# Altium PCB PCB5.pcbdoc
Units mil, origin at the board's own origin, x right, y up, seen from the top; angles counter-clockwise.
Board outline 1968.5 x 791.34 mil, 2 copper layers (Top Layer, Bottom Layer); 30 components, 42 nets, 141 pads, 47 vias.
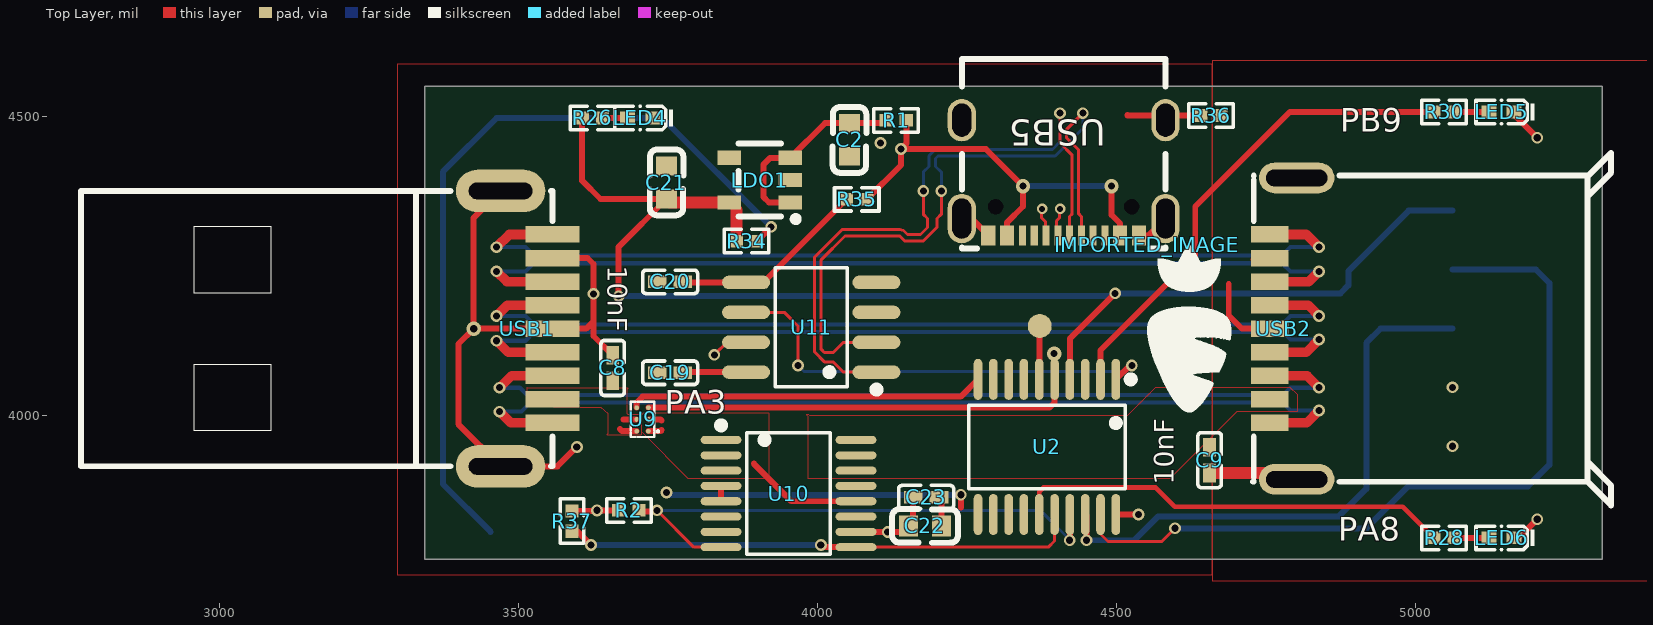
[diagram p0: Top Layer view]
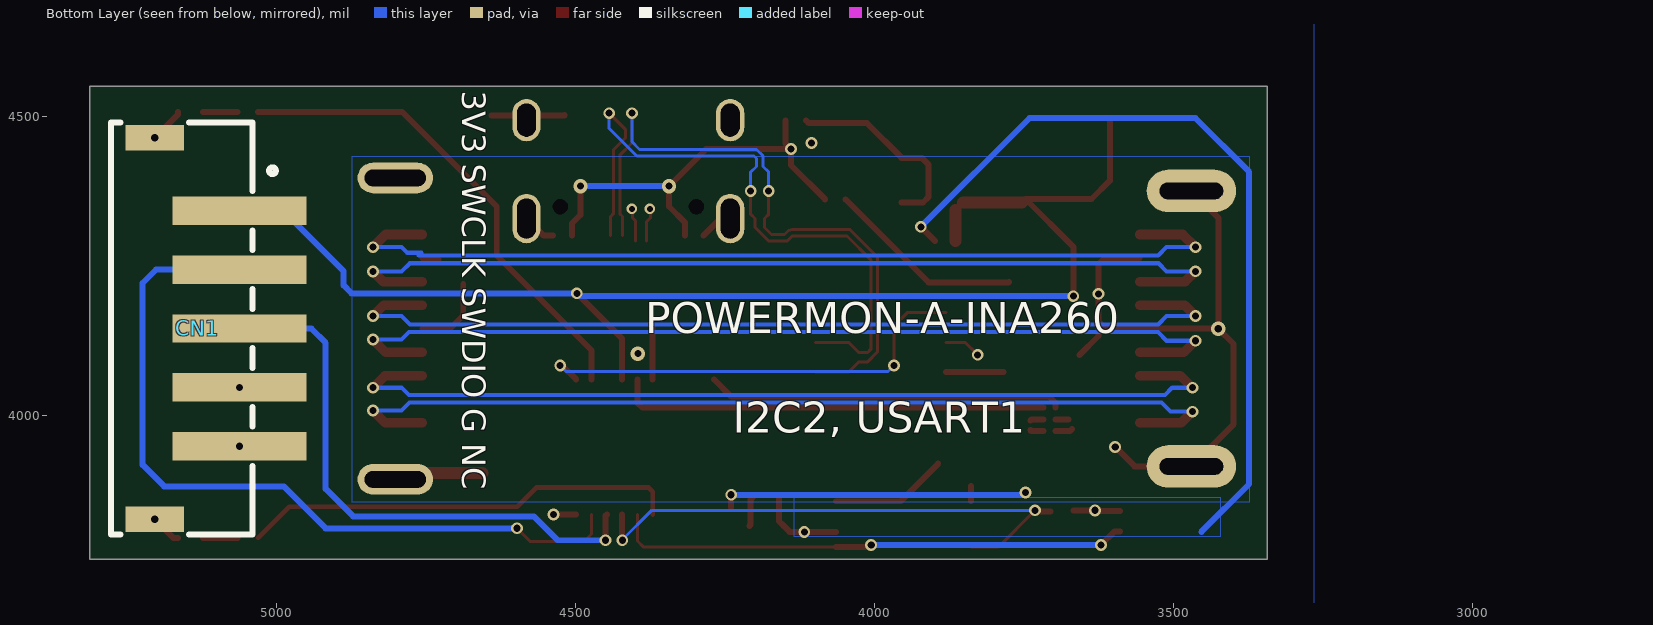
[diagram p1: Bottom Layer view, seen from below]

## Layer stack, top to bottom
Top Solder: solder mask 0.4, Solder Resist, Dk 3.5
Top Layer: signal copper 1.4
Dielectric 1: dielectric 12.6, FR-4, Dk 4.8
Bottom Layer: signal copper 1.4
Bottom Solder: solder mask 0.4, Solder Resist, Dk 3.5

## Board outline
3343.5,3759.42 5312,3759.42 5312,4550.76 3343.5,4550.76

## Components (designator, comment, footprint, x,y, rotation, side; value= is the part's Value field where it differs from the comment)
C2 "" C0603_1 4053.5,4461.15 r90 top
C8 "10nF" C0402 3657.5,4079.55 r270 top
C9 "10nF" C0402 4655.5,3925.55 r90 top
C19 "" C0402_1 3753.5,4071.55 r0 top
C20 "" C0402_1 3753.5,4223.55 r0 top
C21 "" C0603_1 3747.5,4389.55 r270 top
C22 "" C0603_1 4179.5,3815.55 r180 top
C23 "" C0402_1 4181.5,3863.55 r180 top
CN1 "" CONN-SMD_2.54-5P-LT 5132.4,4145.55 r270 bottom
IMPORTED_IMAGE "IMPORTED_IMAGE" IMPORTED_IMAGE 4551.5,4285.55 r0 top
LDO1 "" SOT-23-5_L3.0-W1.7-P0.95-LS2.8-BR 3903.5,4393.55 r0 top
LED4 "" LED0402-RD 3703.5,4497.55 r180 top
LED5 "" LED0402-RD 5143.5,4507.55 r180 top
LED6 "" LED0402-RD 5143.5,3795.55 r180 top
R1 "" R0402 4131.5,4493.55 r180 top
R2 "" R0402 3684.5,3841.55 r180 top
R26 "" R0402 3623.5,4497.55 r0 top
R28 "" R0402 5047.5,3795.55 r0 top
R30 "" R0402 5047.52,4507.55 r0 top
R34 "" R0402 3881.5,4291.55 r0 top
R35 "" R0402 4065.5,4361.55 r0 top
R36 "" R0402 4657.5,4501.55 r180 top
R37 "" R0402 3589.5,3823.55 r90 top
U2 "" TSSOP-20_L6.5-W4.4-P0.65-LS6.4-BL 4383.5,3947.55 r180 top
U9 "" DSBGA-6_L1.5-W1.0-P0.50-TL 3707.5,3993.55 r180 top
U10 "" TSSOP-16_L5.0-W4.4-P0.65-LS6.4-BL 3951.5,3869.55 r270 top
U11 "" SOP-8_L5.0-W4.0-P1.27-LS6.0-BL 3989.5,4147.55 r90 top
USB1 "" USB-3.0-SMD_CU3M002_USBA-M_3 3513.5,4145.25 r270 top
USB2 "" USB-A-SMD_U231-091N-4BLRA00-S-1 4778.5,4145.25 r90 top
USB5 "" USB-C-SMD_TYPE-C-31-M-09 4411.5,4397.55 r180 top

## Footprints (in the part's own frame and the unit in brackets; to place one, negate y for a bottom-side part, rotate by r counter-clockwise, add the part's x,y. Pads: shape width x height; smd on the part's side, far side on the other; paste and mask are expansions set on the pad)
C0402 [mil]
  rect 31.1x21.3 smd: 1(-21.5,0) 2(21.5,0)
  silkscreen extent -46,-20 46,20
C0402_1 [mil]
  rect 31.1x21.3 smd: 1(-21.5,0) 2(21.5,0)
  silkscreen extent -46,-20 46,20
C0603_1 [mil]
  rect 31.5x35.4 smd: 1(-27.6,0) 2(27.6,0)
  silkscreen extent -55,-28 55,28
CONN-SMD_2.54-5P-LT [mil]
  rect 47.2x224.4 smd: 1(-196.9,70.9) 2(-98.4,70.9) 3(0,70.9) 4(98.4,70.9) 5(196.9,70.9)
  rect 43.3x98.4 smd: 6(318.9,-70.9) 7(-318.9,-70.9)
  silkscreen extent -344,-144 344,132
DSBGA-6_L1.5-W1.0-P0.50-TL [mil]
  round 7.9 smd: A1(-9.8,19.7) A2(9.8,19.7) B1(-9.8,0) B2(9.8,0) C1(-9.8,-19.7) C2(9.8,-19.7)
  silkscreen extent -27,-30 20,30
IMPORTED_IMAGE [mil]
  silkscreen extent 0,-280 140,0
LED0402-RD [mil]
  rect 25.1x21.3 smd: 1(-21.2,0) 2(21.2,0)
  silkscreen extent -55,-21 43,21
R0402 [mil]
  rect 22.3x21.3 smd: 1(-17,0) 2(17,0)
  silkscreen extent -37,-20 37,20
SOP-8_L5.0-W4.0-P1.27-LS6.0-BL [mil]
  oval 22.6x80.1 smd: 1(-75,-109) 2(-25,-109) 3(25,-109) 4(75,-109) 5(75,109) 6(25,109) 7(-25,109) 8(-75,109)
  silkscreen extent -110,-115 100,60
SOT-23-5_L3.0-W1.7-P0.95-LS2.8-BR [mil]
  rect 39.4x23.6 smd: 1(51.2,-37.4) 2(51.2,0) 3(51.2,37.4) 4(-51.2,37.4) 5(-51.2,-37.4)
  silkscreen extent -35,-70 65,61
TSSOP-16_L5.0-W4.4-P0.65-LS6.4-BL [mil]
  oval 13.5x68.2 smd: 1(-89.6,-112.8) 2(-64,-112.8) 3(-38.4,-112.8) 4(-12.8,-112.8) 5(12.8,-112.8) 6(38.4,-112.8) 7(64,-112.8) 8(89.6,-112.8) 9(89.6,112.8) 10(64,112.8) 11(38.4,112.8) 12(12.8,112.8) 13(-12.8,112.8) 14(-38.4,112.8) 15(-64,112.8) 16(-89.6,112.8)
  silkscreen extent -120,-119 101,70
TSSOP-20_L6.5-W4.4-P0.65-LS6.4-BL [mil]
  oval 14.3x68.6 smd: 1(-115.2,-113) 2(-89.6,-113) 3(-64,-113) 4(-38.4,-113) 5(-12.8,-113) 6(12.8,-113) 7(38.4,-113) 8(64,-113) 9(89.6,-113) 10(115.2,-113) 11(115.2,113) 12(89.6,113) 13(64,113) 14(38.4,113) 15(12.8,113) 16(-12.8,113) 17(-38.4,113) 18(-64,113) 19(-89.6,113) 20(-115.2,113)
  silkscreen extent -146,-119 131,70
USB-3.0-SMD_CU3M002_USBA-M_3 [mil]
  rect 27.6x90.6 smd: 1(118.1,43.3) 2(39.4,43.3) 3(-39.4,43.3) 4(-118.1,43.3) 5(-157.5,43.3) 6(-78.7,43.3) 7(0,43.3) 8(78.7,43.3) 9(157.5,43.3)
  oval 70.9x149.6 hole 27.6 slot 106.3 at 90 deg: 10(230.3,-43.3) 11(-230.3,-43.3)
  silkscreen extent -230,-745 230,43
USB-A-SMD_U231-091N-4BLRA00-S-1 [mil]
  rect 27.6x63 smd: 1(-118.1,22.6) 2(-39.4,22.6) 3(39.4,22.6) 4(118.1,22.6) 5(157.5,22.6) 6(78.7,22.6) 7(0,22.6) 8(-78.7,22.6) 9(-157.5,22.6)
  oval 51.2x126 hole 27.6 slot 102.4 at 90 deg: 10(-252,-22.6) 11(252,-22.6)
  silkscreen extent -295,-548 294,50
USB-C-SMD_TYPE-C-31-M-09 [mil]
  oval 47.2x82.7 hole 31.5 slot 66.9 at 90 deg: 1(-170.3,68.2) 4(170.3,68.2)
  oval 47.2x70.9 hole 31.5 slot 55.1 at 90 deg: 5(170.3,-96.4) 6(-170.3,-96.4)
  rect 23.6x33.5 smd: A1B12(-126,96.3) A4B9(-94.5,96.3) B1A12(126,96.4) B4A9(94.5,96.4)
  rect 11.8x33.5 smd: A5(-49.2,96.4) A6(-9.8,96.4) A7(9.8,96.4) A8(49.2,96.4) B5(68.9,96.4) B6(29.5,96.4) B7(-29.5,96.4) B8(-68.9,96.4)
  Multi-Layer board cut-out: -126.6,48.5 -125.33,42.95 -121.78,38.49 -116.65,36.02 -110.95,36.02 -105.82,38.49 -102.27,42.95 -101,48.5 -101,48.5 -102.27,54.05 -105.82,58.51 -110.95,60.98 -116.65,60.98 -121.78,58.51 -125.33,54.05 -126.6,48.5
  Multi-Layer board cut-out: 101,48.5 102.27,42.95 105.82,38.49 110.95,36.02 116.65,36.02 121.78,38.49 125.33,42.95 126.6,48.5 126.6,48.5 125.33,54.05 121.78,58.51 116.65,60.98 110.95,60.98 105.82,58.51 102.27,54.05 101,48.5
  silkscreen extent -170,-199 170,119

## Free pads (board coordinates)
  round 40 smd: TP1(4371.5,4149.55)

## Via types
v1: diameter 19.68, hole 11.81, Top Layer to Bottom Layer, 36 vias
v2: diameter 20, hole 12.01, Top Layer to Bottom Layer, 5 vias
v3: diameter 24.02, hole 12.01, Top Layer to Bottom Layer, 4 vias
v4: diameter 17.72, hole 9.84, Top Layer to Bottom Layer, 2 vias

## Nets (pads, with @x,y where several pads share a name; then routed paths per layer and width w, separated by ;. In a path a pad name is that pad's centre, name@x,y a point inside that pad or via, vN(x,y) a via of type N, cw(c..) or ccw(c..) an arc to the next point about the centre after c; other vN are vias at no path point)
$1N8550: LED4.2 R26.2 | length 44.5
  Top Layer w10: R26.2 LED4.2@3685.04,4497.55
$1N16374: LED6.2 R28.2 | length 57.8
  Top Layer w10: R28.2 LED6.2
$1N16519: LED5.2 R30.2 | length 57.8
  Top Layer w10: R30.2 LED5.2
+5V: R1.1 R35.2 USB5.A4B9 USB5.B4A9 | length 718.8
  Top Layer w10: R35.2 4139.5,4418.55 v1(4139.5,4445.55) ; R1.1 4148.5,4454.55 v1(4139.5,4445.55) ; USB5.B4A9 4317,4323.05 4343.5,4349.55 v3(4343.5,4383.55) 4281.5,4445.55 v1(4139.5,4445.55) ; v3(4491.5,4383.55) 4491.5,4335.55 4506,4321.05 USB5.A4B9
  Bottom Layer w10: v3(4343.5,4383.55) v3@4349.5,4383.55 ; v3@4349.6,4383.45 v3@4349.5,4383.55 ; v3(4491.5,4383.55) v3@4349.5,4383.55
C1_CC1: USB5.A5
CS: U2.11
DC3V3: C21.2 CN1.1 LDO1.5 R26.1 R34.1 U2.4 | length 2273.5
  Top Layer w10: R26.1 3606.5,4392.55 3637.1,4361.95 C21.2 ; v1(3667.5,4199.55) 3667.5,4281.95 C21.2 ; C21.2@3753.3,4356.15 C21.2 ; LDO1.5 3864.5,4343.95 ; U2.4 4421.9,4128.63 v1(4497.6,4204.33)
  Top Layer w20: C21.2@3753.3,4356.15 LDO1.5 ; R34.1 3864.5,4343.95
  Bottom Layer w10: v1(3667.5,4199.55) 4492.82,4199.55 v1(4497.6,4204.33) 4874.28,4204.33 4887.5,4217.55 4887.5,4241.55 4988.4,4342.45 CN1.1
DGND: C8.1 C9.1 R36.1 USB1.4 USB1.7 USB1.10 USB1.11 USB2.4 USB2.7 USB2.10 USB2.11 | length 1438.9
  Top Layer w10: USB1.11 3425.2,4330.55 v3(3425.2,4145.25) ; USB1.4 3615.45,4263.35 3625.5,4253.3 v1(3625.5,4203.55) 3625.5,4157.45 ; v2(3597.5,3947.55) 3564.9,3914.95 USB1.10 3399.5,3985.65 3399.5,4119.55 v3(3425.2,4145.25) ; C8.1 3625.5,4133.05 3625.5,4157.45 ; 4687.5,4219.55 4687.5,4167.35 4709.6,4145.25 USB2.7 ; USB2.4@4728.5,4260.55 4731.3,4263.35 USB2.4 USB2.4@4753.1,4260.55 ; USB2.11@4778.2,4397.25 USB2.11 ; USB2.10@4790.3,3904.05 USB2.10 ; v3(3425.2,4145.25) USB1.7 3613.3,4145.25 3625.5,4157.45
  Top Layer w20: C9.1 USB2.10@4790.3,3904.05
DM1: USB1.2 USB2.2 | length 1578.8
  Top Layer w16: v1(3463.5,4125.08) 3482.73,4105.85 USB1.2 ; USB2.2 4817.23,4105.85 v1(4838.5,4127.12)
  Bottom Layer w6.9: v1(3463.5,4125.08) 3511.52,4125.08 3525.98,4139.55 4778.06,4139.55 4790.48,4127.12 v1(4838.5,4127.12)
DN: U11.2 USB5.A7 USB5.B7 | length 1352.5
  Top Layer w5: U11.2 4043.45,4122.55 4026.45,4105.55 4011.45,4105.55 4006.15,4110.85 4006.15,4260.42 4045.78,4300.05 4137.5,4300.05 4145.69,4291.86 4176.78,4291.86 4199.45,4314.53 4199.89,4314.53 4199.89,4329.53 4206.9,4336.53 v1(4206.9,4375.55) ; USB5.A7@4399.5,4291.83 4399.5,4325.55 4404.5,4330.55 4404.5,4344.55 v4(4405.5,4345.55) ; USB5.B7 4441,4332.9 4436.65,4337.25 4436.65,4443.95 4416.5,4464.1 4416.5,4478.55 v1(4443.5,4505.55)
  Mid-Layer 1 w5: v4(4405.5,4345.55) 4405.5,4378.27 4398.28,4385.49 4398.28,4411.09 4432.06,4444.86 4432.5,4444.86 4432.5,4459.86 4443.5,4470.86 v1(4443.5,4505.55)
  Bottom Layer w5: v1(4206.9,4375.55) 4206.9,4407.07 4197.39,4416.57 4197.39,4429.66 4201.59,4433.86 4397.37,4433.86 4443.5,4479.99 v1(4443.5,4505.55)
DP: U11.1 USB5.A6 USB5.B6 | length 1348.3
  Top Layer w5: U11.1 4043.45,4072.55 4026.45,4089.55 4011.45,4089.55 4011.45,4089.99 3995.15,4106.3 3995.15,4264.97 4041.22,4311.05 4137.5,4311.05 4143.67,4309.44 4150.25,4302.86 4172.22,4302.86 4183.89,4314.53 4183.89,4329.53 4176.88,4336.53 v1(4176.88,4375.55) ; v4(4375.5,4345.55) 4374.5,4344.55 4374.5,4330.55 4381.5,4323.55 USB5.B6@4381.5,4291.83 ; v1(4405.5,4505.55) 4405.5,4455.55 4425.65,4435.4 4425.65,4337.25 4421.3,4332.9 USB5.A6
  Mid-Layer 1 w5: v4(4375.5,4345.55) 4375.5,4376.44 4384.32,4385.27 4384.32,4412.69 4416.5,4444.86 4416.5,4459.86 4405.5,4470.86 v1(4405.5,4505.55)
  Bottom Layer w5: v1(4176.88,4375.55) 4176.88,4407.07 4186.39,4416.57 4186.39,4434.22 4197.04,4444.86 4392.81,4444.86 4405.5,4457.55 v1(4405.5,4505.55)
DP1: USB1.3 USB2.3 | length 1577.6
  Top Layer w16: v1(3463.5,4166.55) 3481.6,4184.65 USB1.3 ; USB2.3 4820.4,4184.65 v1(4838.5,4166.55)
  Bottom Layer w6.9: v1(3463.5,4166.55) 3511.52,4166.55 3525.61,4152.45 4776.39,4152.45 4790.48,4166.55 v1(4838.5,4166.55)
GND: C2.1 C19.1 C20.1 C21.1 C22.1 C23.1 CN1.4 CN1.6 CN1.7 LDO1.2 LED4.1 LED5.1 LED6.1 R36.2 U2.5 U9.C1 U10.4 U10.5 U10.6 U10.11 U11.3 USB5.1 USB5.4 USB5.5 USB5.6 USB5.A1B12 USB5.B1A12 | length 1660.6
  Top Layer w10: U9.C1 4387.88,4013.25 4396.3,4021.67 U2.5 ; U10.5 U10.4 ; C23.1 4207.1,3859.45 4207.1,3817.55 C22.1@4209.1,3815.55 ; 4239.5,3845.95 v1(4239.5,3867.55) ; USB5.4@4239.5,4331.55 4255.1,4331.55 USB5.B1A12 ; 4518,4502.15 4518.6,4501.55 R36.2 ; USB5.A1B12 4553.7,4301.25 USB5.1 ; LED6.1 5172.2,3795.55 v1(5203.3,3826.65) ; LED5.1 5164.7,4503.05 v1(5203.3,4464.45)
  Bottom Layer w10: v2(3747.5,3871.55) 3751.5,3867.55 v1(4239.5,3867.55)
  other v1: 5061.5,4047.15 4105.5,4455.55
  other v3: 4395.5,4103.55
LDOVIN: C2.2 LDO1.1 LDO1.3 R1.2 | length 338.7
  Top Layer w10: LDO1.1 3918.9,4356.15 3909.5,4365.55 3909.5,4419.55 3920.9,4430.95 LDO1.3 4012.5,4488.75 C2.2 4109.7,4488.75 R1.2
MISO: U2.13
MOSI: U2.9
NRST: CN1.5 pad.TP1 U2.6 | length 89.3
  Top Layer w10: U2.6 4371.5,4061.35 pad.TP1
  other v1: 5061.5,3948.65
OSC32_OUT: U2.3
PA0: U2.7
PA3: U2.10 U9.C2 | length 595.2
  Top Layer w10: U9.C2 3697.7,4021.75 3707.5,4031.55 4239.3,4031.55 U2.10
PA5: U2.12
PA7: U2.14
PA8: R28.1 U2.15 | length 735.6
  Top Layer w8: U2.15 4370.7,3872.75 4377.5,3879.55 4565.5,3879.55 4597.5,3847.55 4978.5,3847.55 R28.1
PB9: R30.1 U2.2 | length 819.1
  Top Layer w10: U2.2 4473.1,4109.15 4631.5,4267.55 4631.5,4349.55 4789.5,4507.55 R30.1
SCL: R37.1 U2.16 U10.9 | length 866.3
  Top Layer w5: U10.9 4385.9,3779.95 4396.3,3790.35 U2.16
  Top Layer w10: R37.1 3598.5,3806.55 v2(3621.5,3783.55) ; v2(4005.5,3783.55) 4009.1,3779.95 U10.9
  Bottom Layer w10: v2(3621.5,3783.55) v2(4005.5,3783.55)
SCLK: U2.8
SDA: R2.1 U2.17 U10.8 | length 913.7
  Top Layer w5: v1(3731.5,3841.55) 3793.1,3779.95 U10.8
  Top Layer w10: R2.1@3705.5,3839.55 3729.5,3839.55 v1(3731.5,3841.55) ; v1(4421.5,3791.55) 4421.9,3791.95 U2.17
  Bottom Layer w5: v1(3731.5,3841.55) 4372.3,3841.55 v1@4421.9,3791.95
SSRX+: USB1.6 USB2.6 | length 1576.3
  Top Layer w16: v1(3463.5,4241.14) 3480.69,4223.95 USB1.6 ; USB2.6 4821.43,4223.95 v1(4838.5,4241.02)
  Bottom Layer w6.9: v1(3463.5,4241.14) 3511.52,4241.14 3525.03,4254.66 4776.85,4254.66 4790.48,4241.02 v1(4838.5,4241.02)
SSRX-: USB1.5 USB2.5 | length 1582.8
  Top Layer w16: v1(3463.5,4281.55) 3484.7,4302.75 USB1.5 ; USB2.5 4817.3,4302.75 v1(4838.5,4281.55)
  Bottom Layer w6.9: v1(3463.5,4281.55) 3511.52,4281.55 3525.52,4267.55 4761.96,4267.55 ; 4757.22,4272.29 4781.22,4272.29 4790.48,4281.55 v1(4838.5,4281.55)
SSTX+: USB1.9 USB2.9 | length 1568.9
  Top Layer w16: v1(3468.5,4006.55) 3487.3,3987.75 USB1.9 ; USB2.9 4817.93,3987.75 v1(4838.5,4008.32)
  Bottom Layer w6.9: v1(3468.5,4006.55) 3505.18,4006.55 3520.18,4021.55 4777.25,4021.55 4790.48,4008.32 v1(4838.5,4008.32)
SSTX-: USB1.8 USB2.8 | length 1567.5
  Top Layer w16: v1(3468.5,4046.55) 3488.5,4066.55 USB1.8 ; USB2.8 4818.5,4066.55 v1(4838.5,4046.55)
  Bottom Layer w6.9: v1(3468.5,4046.55) 3502.18,4046.55 3514.33,4034.41 4778.34,4034.41 4790.48,4046.55 v1(4838.5,4046.55)
SWCLK: CN1.2 U2.19 | length 1316.4
  Top Layer w5: U2.19 4473.1,3801.95 4485.5,3789.55 4575.5,3789.55 v1(4597.5,3811.55)
  Bottom Layer w10: v1(4597.5,3811.55) 4917.5,3811.55 4987.5,3881.55 5187.5,3881.55 5223.5,3917.55 5223.5,4221.55 5201.1,4243.95 CN1.2
SWDIO: CN1.3 U2.18 | length 945.4
  Top Layer w10: U2.18 4449.5,3832.55 v1(4449.5,3791.55)
  Bottom Layer w10: v1(4449.5,3791.55) 4529.5,3791.55 4569.44,3831.49 4871.44,3831.49 4917.5,3877.55 4917.5,4121.55 4941.5,4145.55 CN1.3
USART1_RX: U2.1 U11.6 | length 765.1
  Top Layer w5: U11.6 3944.5,4172.55 3967.5,4149.55 v1(3967.5,4083.55)
  Top Layer w10: U2.1 4521.7,4083.55 v1(4525.5,4083.55)
  Bottom Layer w5: v1(3967.5,4083.55) 3977.5,4073.55 4515.5,4073.55 v1(4525.5,4083.55)
USART1_TX: U2.20 U11.7 | length 952.6
  Top Layer w5: v1(3827.5,4101.55) 3848.5,4122.55 U11.7
  Top Layer w10: U2.20 v1(4536.5,3834.55)
  Mid-Layer 1 w10: v1@3825.5,4101.55 3863.5,4139.55 4231.5,4139.55 v1(4536.5,3834.55)
V3: C19.2 U11.8 | length 96.5
  Top Layer w10: C19.2@3784,4072.55 U11.8
VBUS: C9.2 U10.14 U10.15 U10.16 USB2.1
VCC: C20.2 R35.1 U11.5 | length 331.5
  Top Layer w10: C20.2 3776,4222.55 3909.5,4222.55 R35.1
VS+: C22.2 C23.2 R2.2 R34.2 R37.2 U10.10 | length 1552.3
  Top Layer w10: R37.2 3630.5,3840.55 v2(3631.5,3841.55) R2.2 ; R34.2 v1(3922.5,4315.55) ; U10.10 v1(4117.24,3805.55) 4141.9,3805.55 C22.2 4160,3823.65 C23.2
  Bottom Layer w10: 3453.5,3805.55 3373.5,3885.55 3373.5,4407.55 3463.5,4497.55 3740.5,4497.55 v1(3922.5,4315.55)
VUSB: U9.A1 U9.B1 U10.1 U10.2 U10.3 U10.12 | length 242.7
  Top Layer w10: U9.A1 3737.8,3973.85 3739.5,3975.55 ; U9.B1 3737.5,3993.55 3739.5,3991.55 ; 3893.5,3919.55 3956.3,3856.75 U10.12
VUSBIN: C8.2 U9.A2 U9.B2 USB1.1 | length 51.9
  Top Layer w10: 3669.5,3977.55 3673.2,3973.85 U9.A2 ; 3675.5,3993.55 U9.B2
"": LDO1.4 U10.7 U10.13 U11.4 USB5.A8 USB5.B5 USB5.B8

## Polygon pours and split planes (outlines as drawn)
VS+ on Bottom Layer (solid, remove dead copper, pour order 3): 3421.5,3797.61 4133.7,3797.61 4133.7,3863.51 3421.5,3863.51
DGND on Bottom Layer (solid, remove dead copper, pour order 4): 3373.5,3855.48 4873,3855.48 4873,4433.88 3373.5,4433.88
GND on Bottom Layer (solid, remove dead copper, pour order 5): 3265.5,3681.55 5441.5,3681.55 5441.5,4673.55 3265.5,4673.55
DGND on Top Layer (solid, remove dead copper, pour order 6): 4659.5,3723.57 5403.5,3723.57 5403.5,4593.55 4659.5,4593.55
GND on Top Layer (solid, remove dead copper, pour order 7): 3297.52,3733.55 4659.5,3733.55 4659.5,4587.55 3297.52,4587.55
DGND on Mid-Layer 2 (solid, remove dead copper, pour order 8): 3213.5,3713.55 5415.5,3713.55 5415.5,4651.55 3213.5,4651.55
GND on Mid-Layer 1 (solid, remove dead copper, pour order 9): 3281.5,3725.55 5419.5,3725.55 5419.5,4621.55 3281.5,4621.55
VUSBIN on Top Layer (solid, remove dead copper, pour order 0): 3514.18,4015.55 3603.5,4013.55 3637.5,4013.55 3649.5,4003.55 3649.5,3969.55 3647.5,3967.55 3705.18,3967.55 3705.98,3968.35 3705.98,4000.03 3705.5,4001.55 3683.45,4001.55 3681.6,4003.4 3681.6,4043.65 3683.5,4045.55 3515.66,4045.55 3514.66,4046.55 3514.18,4046.08
VUSB on Top Layer (solid, remove dead copper, pour order 1): 3705.5,3999.55 3705.5,3972.9 3707.5,3970.9 3782.85,3895.55 3919.5,3895.55 3919.5,3969.91 3919.5,4003.55 3787.5,4003.55 3757.5,4003.55 3708.32,4003.55 3708.17,4003.4 3705.5,4000.73
VBUS on Top Layer (solid, remove dead copper, pour order 2): 3981.5,4001.55 3983.5,3999.55 3983.5,3895.55 4589.5,3895.55 4701.5,4007.55 4801.81,4007.55 4802.58,4008.32 4802.58,4034.45 4790.48,4046.55 4716.87,4046.55 4564.5,4046.55 4517.5,3999.55 3987.5,3999.55 3985.5,4001.55

## Silkscreen, mask and mechanical layers (free items; w line width, h text height)
Top Overlay:
  text "PB9" at 4874.18,4474.87 h38.94
  text "PA3" at 3744.18,4002.87 h38.94
  text "PA8" at 4870.18,3790.87 h38.94
Bottom Overlay:
  text "3V3 SWCLK SWDIO G NC" at 4689.11,4542.87 h38.94 r90
  text "POWERMON-A-INA260" at 4383.15,4137.31 h51.92
  text "I2C2, USART1" at 4236.55,3971.31 h51.92